# Altium PCB PCB1.PcbDoc
Units mm, origin at the board's own origin, x right, y up, seen from the top; angles counter-clockwise.
Board outline 110 x 110 mm, 2 copper layers (Top Layer, Bottom Layer); 3 components, 5 nets, 68 pads, 0 vias.
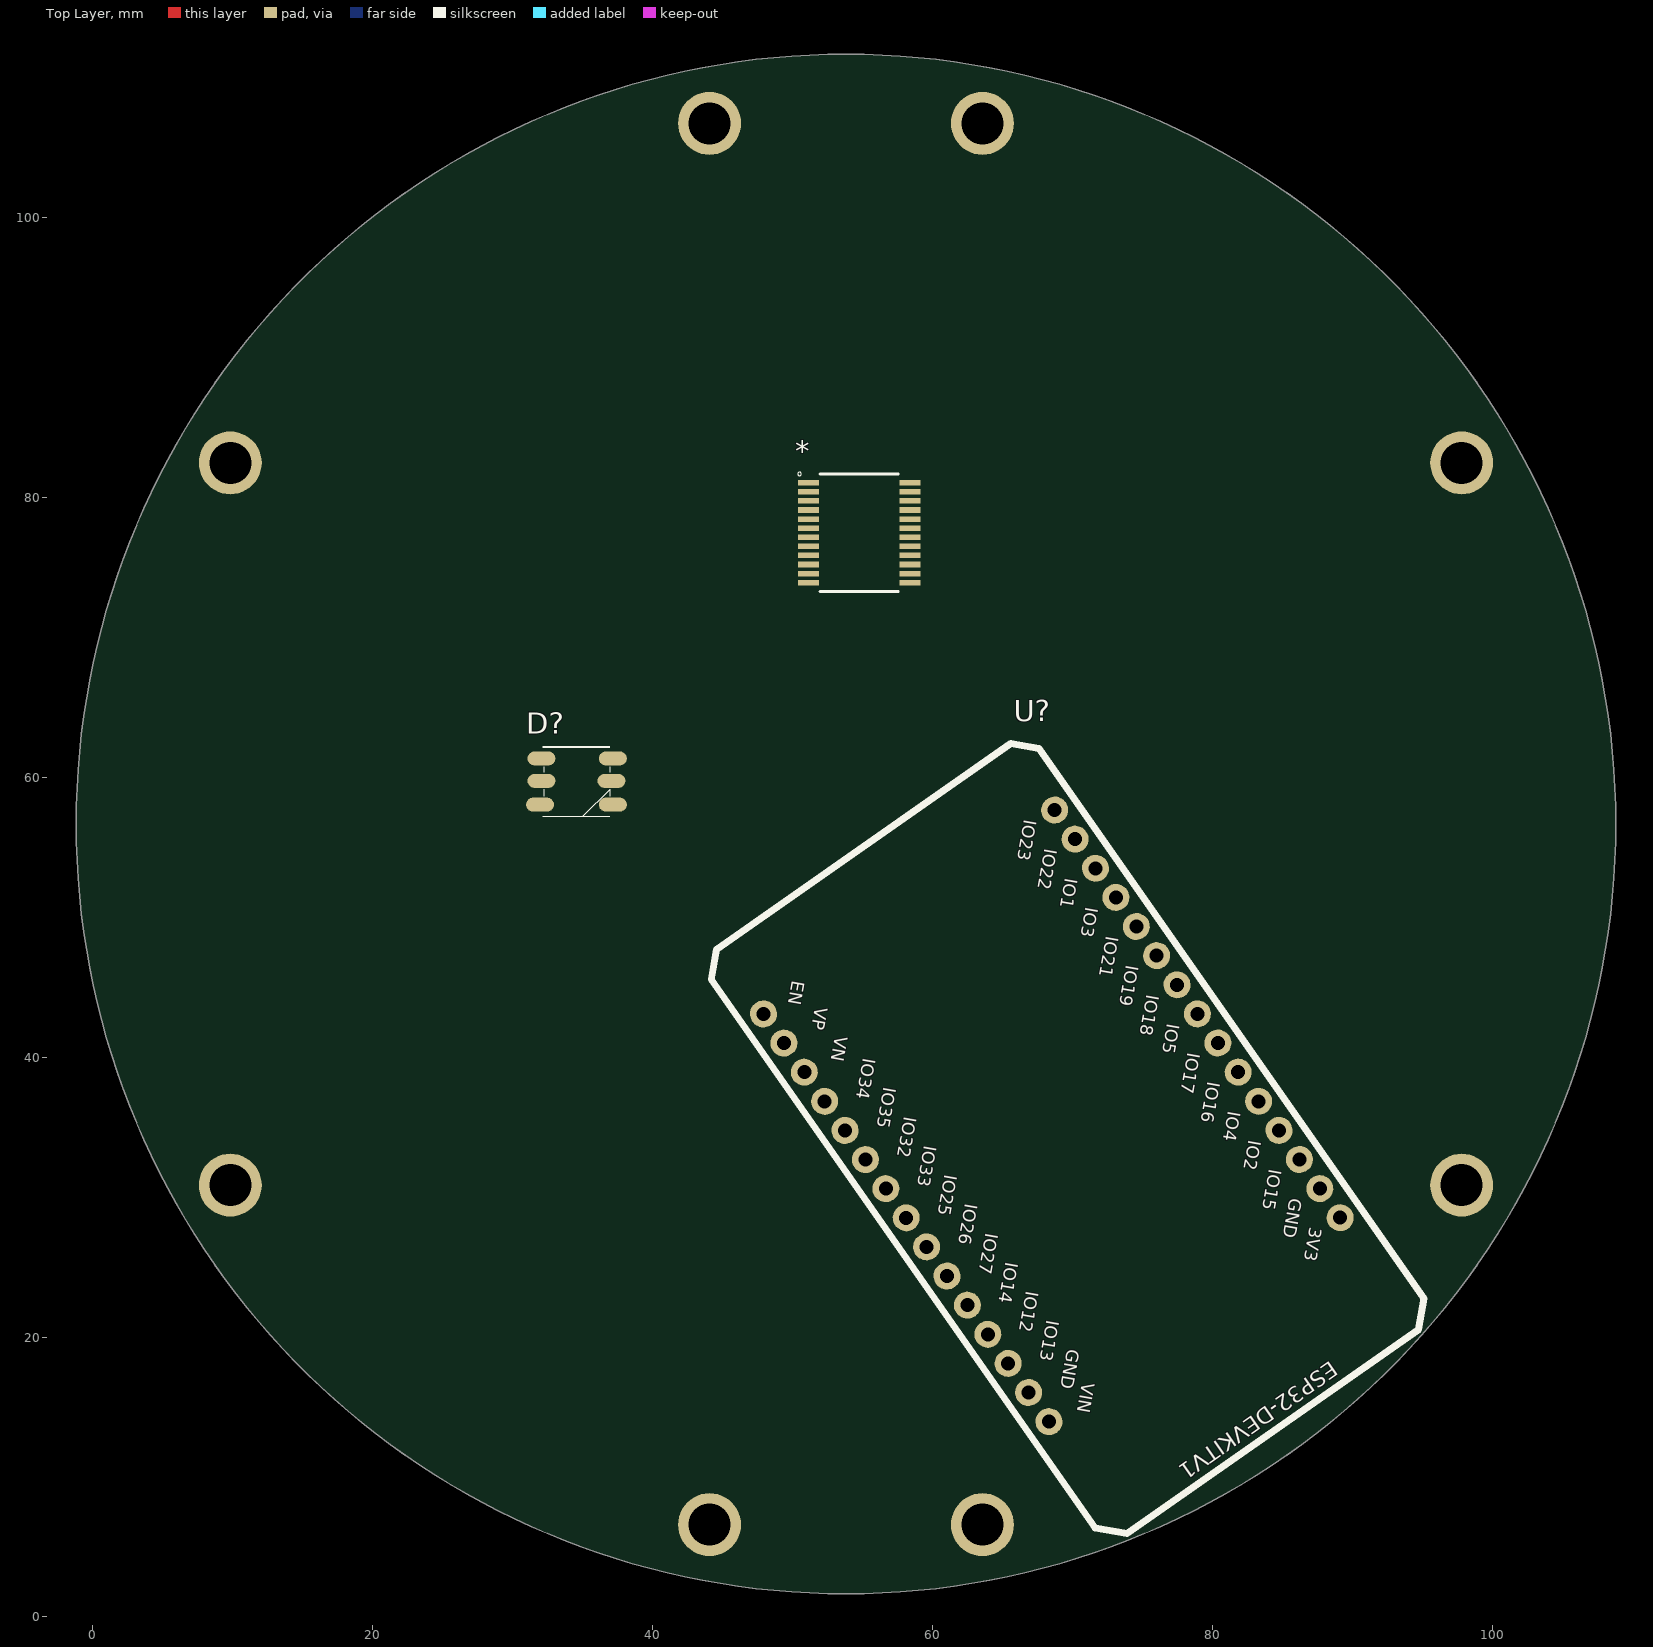
[diagram p0: Top Layer view]
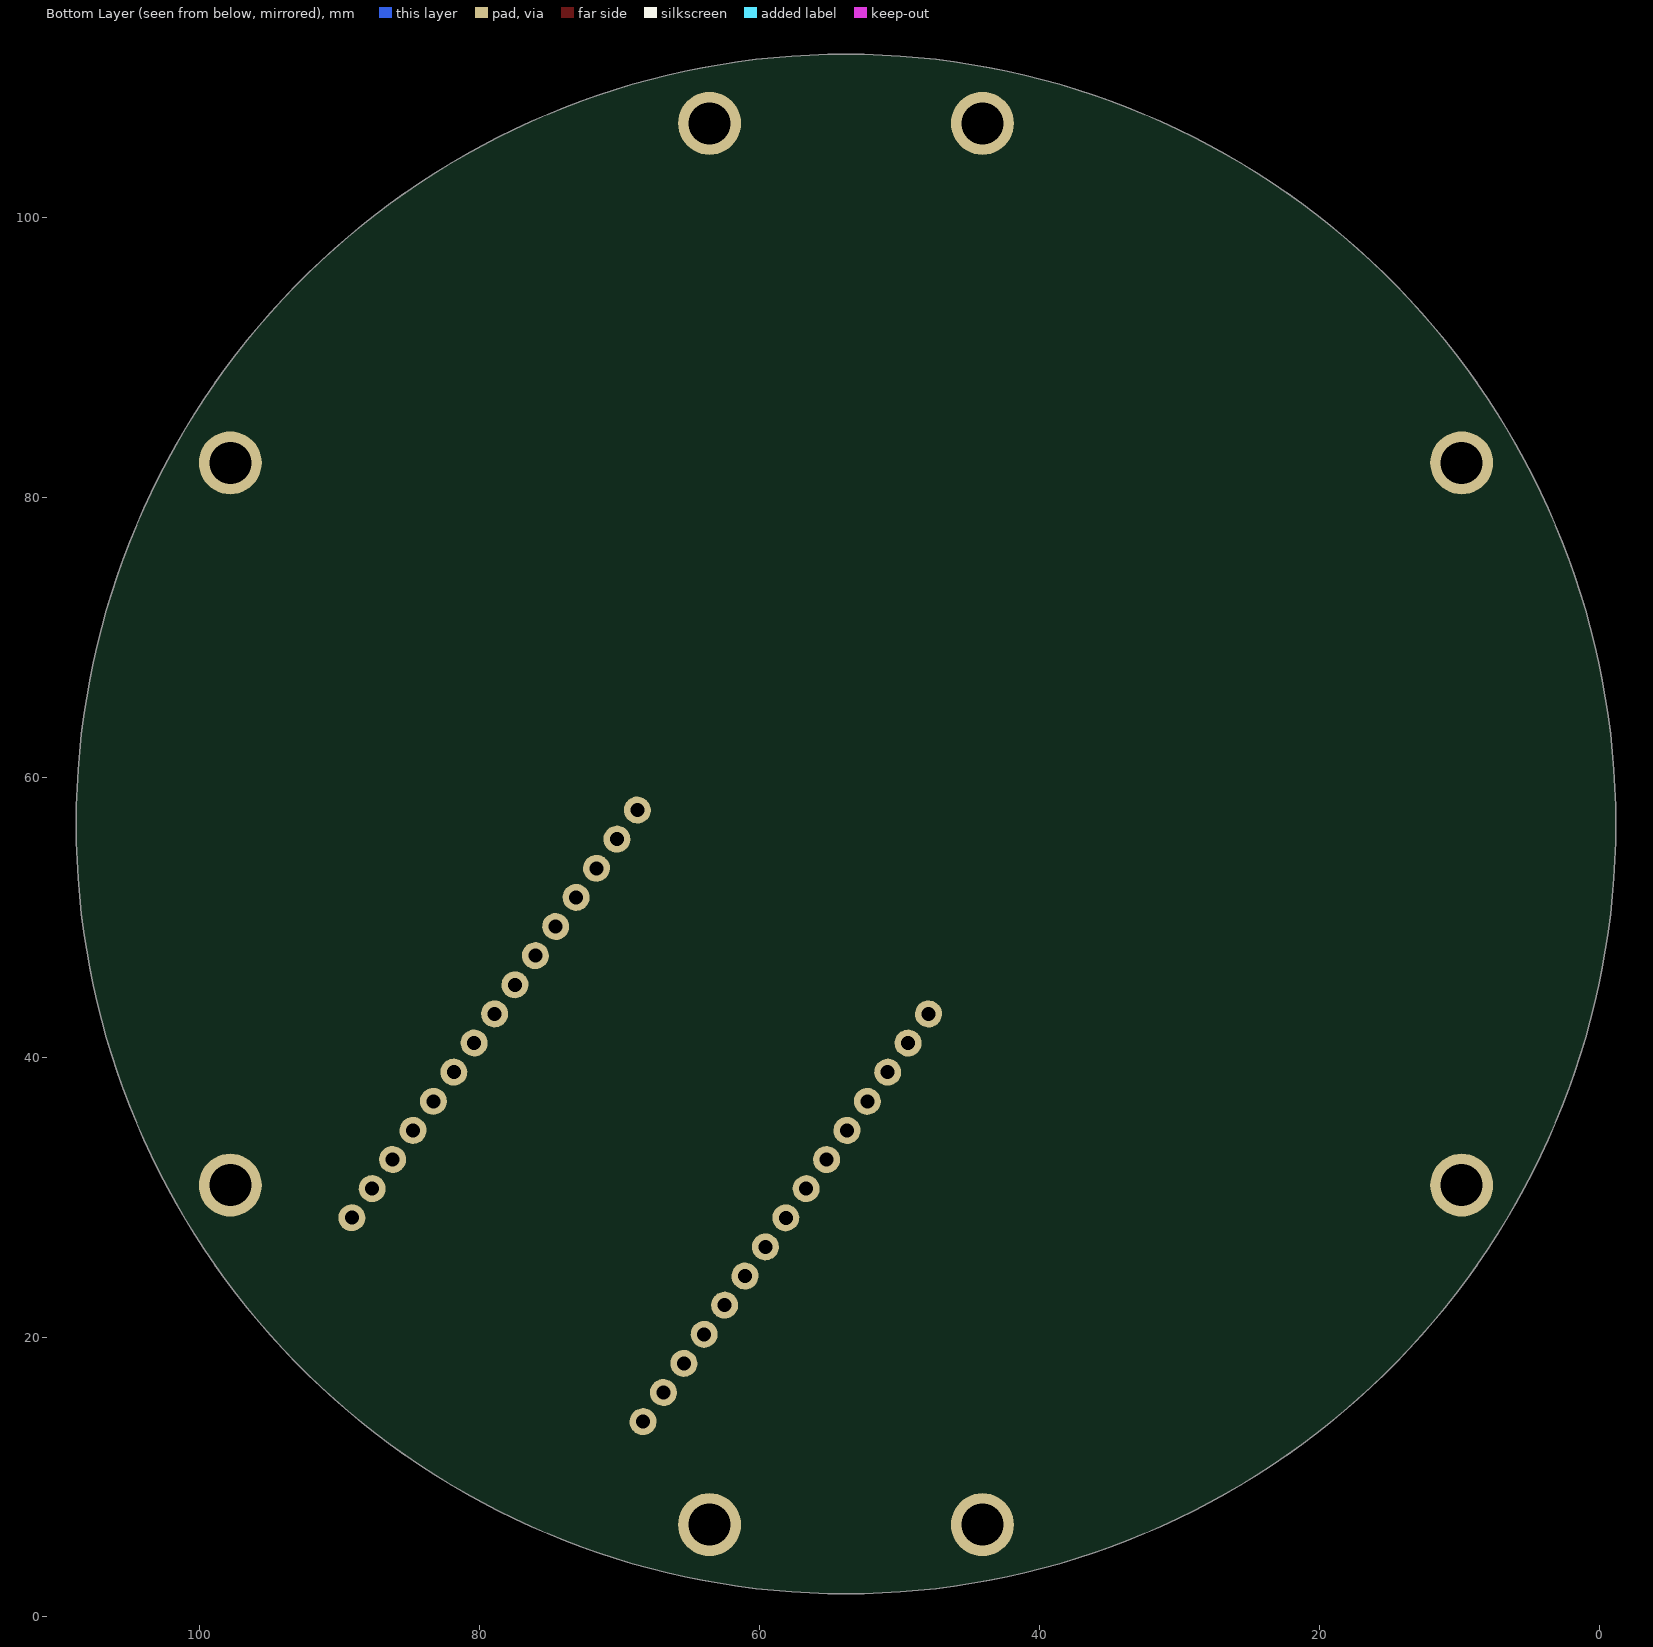
[diagram p1: Bottom Layer view, seen from below]

## Layer stack, top to bottom
Top Solder: solder mask 0.0102, Solder Resist, Dk 3.5
Top Layer: signal copper 0.0356
Dielectric 1: dielectric 0.32, FR-4, Dk 4.8
Bottom Layer: signal copper 0.0356
Bottom Solder: solder mask 0.0102, Solder Resist, Dk 3.5

## Board outline
53.803,1.657 cw(c53.803,56.657) -1.197,56.657 cw(c53.803,56.657) 53.803,111.657 cw(c53.803,56.657) 108.803,56.657 cw(c53.803,56.657)

## Design rules (kind name [scope] priority, off if disabled: settings)
Clearance [All] p1: gap=0.254 ignorepadtopadclearanceinfootprint=FALSE except(0: Arc-Hole Track-Hole SMDPad-Hole THPad-Hole Via-Hole Fill-Hole Poly-Hole Region-Hole Text-Hole)
PolygonConnect [All] p1: connectstyle=Relief reliefconductorwidth=0.254 reliefentries=4 polygonreliefangle="90 Angle" airgapwidth=0.254
RoutingVias [All] p1: holewidth=0.711 width=1.27 viastyle="Through Hole" minholewidth=0.711 minwidth=1.27 maxholewidth=0.711 maxwidth=1.27
SolderMaskExpansion [All] p1: expansion=0.102 istentingtop=FALSE
Width [All] p1: maxlimit=0.254 minlimit=0.254 preferedwidth=0.254
30 further rules are at their usual default settings.

## Classes and differential pairs
component class Sheet_1_Main_bord: D? U?

## Components (designator, comment, footprint, x,y, rotation, side; value= is the part's Value field where it differs from the comment)
* "tb6612" Ssop24_SOP65P760X160-24N 54.737,77.47 r0 top
D? "probably led colors not mach to real please check the device and change the component" "5050 LED package" 34.544,59.69 r0 top
U? "ESP32-DEVKITC-32D" MODULE_ESP32-DEVKITV1 70.104,33.528 r215 top

## Footprints (in the part's own frame and the unit in brackets; to place one, negate y for a bottom-side part, rotate by r counter-clockwise, add the part's x,y. Pads: shape width x height; smd on the part's side, far side on the other; paste and mask are expansions set on the pad)
"5050 LED package" [mm] "DESIGNER ABBAS BASEREH"
  oval 2x1 smd: 1(2.6,-1.65) 2(2.5,0.05) 3(2.6,1.65) 4(-2.5,1.65) 5(-2.5,0.05) 6(-2.6,-1.65)
  silkscreen extent -2.41,-2.49 2.4,2.51, body extent -2.75,-2.5 2.75,2.5, height 1.55
MODULE_ESP32-DEVKITV1 [mm]
  round 1.93 / inner round 1.524 / far side round 1.93 hole 1: 1(-12.7,15) 2(-12.7,12.46) 3(-12.7,9.92) 4(-12.7,7.38) 5(-12.7,4.84) 6(-12.7,2.3) 7(-12.7,-0.24) 8(-12.7,-2.78) 9(-12.7,-5.32) 10(-12.7,-7.86) 11(-12.7,-10.4) 12(-12.7,-12.94) 13(-12.7,-15.48) 14(-12.7,-18.02) 15(-12.7,-20.56) 16(12.7,-20.56) 17(12.7,-18.02) 18(12.7,-15.48) 19(12.7,-12.94) 20(12.7,-10.4) 21(12.7,-7.86) 22(12.7,-5.32) 23(12.7,-2.78) 24(12.7,-0.24) 25(12.7,2.3) 26(12.7,4.84) 27(12.7,7.38) 28(12.7,9.92) 29(12.7,12.46) 30(12.7,15)
  silkscreen extent -14.31,-26.26 14.35,24.75, body extent -14.22,-26.09 14.28,24.84, height 7.2
Ssop24_SOP65P760X160-24N [mm]
  rect 1.5x0.4 smd: 1(-3.625,3.575) 2(-3.625,2.925) 3(-3.625,2.275) 4(-3.625,1.625) 5(-3.625,0.975) 6(-3.625,0.325) 7(-3.625,-0.325) 8(-3.625,-0.975) 9(-3.625,-1.625) 10(-3.625,-2.275) 11(-3.625,-2.925) 12(-3.625,-3.575) 13(3.625,-3.575) 14(3.625,-2.925) 15(3.625,-2.275) 16(3.625,-1.625) 17(3.625,-0.975) 18(3.625,-0.325) 19(3.625,0.325) 20(3.625,0.975) 21(3.625,1.625) 22(3.625,2.275) 23(3.625,2.925) 24(3.625,3.575)
  silkscreen extent -4.38,-4.2 2.8,4.33

## Part data
D?: library part "LED SMD 5050 RGB", "SMD 5050 RGB LED", Comment_1="SMD 5050 RGB", ComponentLink1Description="SMD 5050 RGB", ComponentLink1URL=http://www.yuanlei-led.com, ComponentLink2Description=Reference, Design Date=1395/11/10, Designer="Abbas Basereh", HelpURL="probably color of the leds not mached real please check and change", Mounting Technology="Surface Mount", PackageDescription="SMD 5050 RGB", Pin Count=6, Publisher="Abbas Basereh", Status=Unreleased
U?: "Eval Board For Esp-Wroom-32", Package=None, Availability=Unavailable, MF="Espressif Systems", MP=ESP32-DEVKITC-32D, Price=None, SnapEDA_Link=https://www.snapeda.com/parts/ESP32-DEVKITC-32D/Espressif%20Systems/view-part/?ref=snap

## Free pads (board coordinates)
  round 4.5 hole 3: 6(9.811,82.457) 7(9.811,30.857) 8(44.053,106.717) 9(63.553,106.717) 10(97.796,82.457) 11(97.796,30.857) 12(63.553,6.598) 13(44.053,6.598)

## Nets (pads, with @x,y where several pads share a name; then routed paths per layer and width w, separated by ;. In a path a pad name is that pad's centre, name@x,y a point inside that pad or via, vN(x,y) a via of type N, cw(c..) or ccw(c..) an arc to the next point about the centre after c; other vN are vias at no path point)
GND: 
PWM_L: 
PWM_R: 
SCL: 
SDA: 
pads on no net: *.1 *.2 *.3 *.4 *.5 *.6 *.7 *.8 *.9 *.10 *.11 *.12 *.13 *.14 *.15 *.16 *.17 *.18 *.19 *.20 *.21 *.22 *.23 *.24 D?.1 D?.2 D?.3 D?.4 D?.5 D?.6 U?.1 U?.2 U?.3 U?.4 U?.5 U?.6 U?.7 U?.8 U?.9 U?.10 U?.11 U?.12 U?.13 U?.14 U?.15 U?.16 U?.17 U?.18 U?.19 U?.20 U?.21 U?.22 U?.23 U?.24 U?.25 U?.26 U?.27 U?.28 U?.29 U?.30

## Silkscreen, mask and mechanical layers (free items; w line width, h text height)
Mechanical 1:
  circle w0.5: c53.803,56.657 r55
  circle w0.013: c9.811,30.857 r1.5
  circle w0.013: c44.053,106.717 r1.5
  circle w0.013: c44.053,6.598 r1.5
  circle w0.013: c63.553,106.717 r1.5
  circle w0.013: c63.553,6.598 r1.5
  circle w0.013: c97.796,82.457 r1.5
  circle w0.013: c97.796,30.857 r1.5
  circle w0.013: c9.811,82.457 r1.5
  circle w0.013: c82.793,30.857 r1.5
  circle w0.013: c63.553,14.598 r1.5
  circle w0.013: c82.793,82.457 r1.5
  circle w0.013: c63.553,98.717 r1.5
  circle w0.013: c44.053,14.598 r1.5
  circle w0.013: c24.814,30.857 r1.5
  circle w0.013: c24.814,82.457 r1.5
  circle w0.013: c44.053,98.717 r1.5
  lines w0.013: 48.858,56.657 53.803,56.657 53.803,61.737
  lines w0.35: 108.803,56.642 cw(c53.803,56.657) 108.803,56.896

## Text inside footprints (layer, text, board x,y; h text height)
U?: Top Overlay "EN" at 49.652,45.564 h1.57 r260; Top Overlay "VP" at 51.273,43.684 h1.57 r260; Top Overlay "VN" at 52.73,41.603 h1.57 r260; Top Overlay "IO34" at 54.714,40.026 h1.57 r260; Top Overlay "IO35" at 56.171,37.945 h1.57 r260; Top Overlay "IO32" at 57.628,35.864 h1.57 r260; Top Overlay "IO33" at 59.085,33.784 h1.57 r260; Top Overlay "IO25" at 60.541,31.703 h1.57 r260; Top Overlay "IO26" at 61.998,29.622 h1.57 r260; Top Overlay "IO27" at 63.455,27.542 h1.57 r260; Top Overlay "IO14" at 64.912,25.461 h1.57 r260; Top Overlay "IO12" at 66.369,23.38 h1.57 r260; Top Overlay "IO13" at 67.826,21.3 h1.57 r260; Top Overlay "GND" at 69.283,19.219 h1.57 r260; Top Overlay "VIN" at 70.344,16.849 h1.57 r260; Top Overlay "IO23" at 66.234,57.065 h1.57 r260; Top Overlay "IO22" at 67.691,54.984 h1.57 r260; Top Overlay "IO1" at 69.148,52.903 h1.57 r260; Top Overlay "IO3" at 70.605,50.823 h1.57 r260; Top Overlay "IO21" at 72.061,48.742 h1.57 r260; Top Overlay "IO19" at 73.518,46.661 h1.57 r260; Top Overlay "IO18" at 74.975,44.581 h1.57 r260; Top Overlay "IO5" at 76.432,42.5 h1.57 r260; Top Overlay "IO17" at 77.889,40.42 h1.57 r260; Top Overlay "IO16" at 79.346,38.339 h1.57 r260; Top Overlay "IO4" at 80.803,36.258 h1.57 r260; Top Overlay "IO2" at 82.26,34.178 h1.57 r260; Top Overlay "IO15" at 83.717,32.097 h1.57 r260; Top Overlay "GND" at 85.173,30.016 h1.57 r260; Top Overlay "3V3" at 86.63,27.936 h1.57 r260; Top Overlay "ESP32-DEVKITV1" at 88.202,18.648 h1.97 r215